# Altium PCB PCB1.PcbDoc
Units mil, origin at the board's own origin, x right, y up, seen from the top; angles counter-clockwise.
Board outline 1425.03 x 440.03 mil, 2 copper layers (Top Layer, Bottom Layer); 8 components, 6 nets, 20 pads, 1 vias.
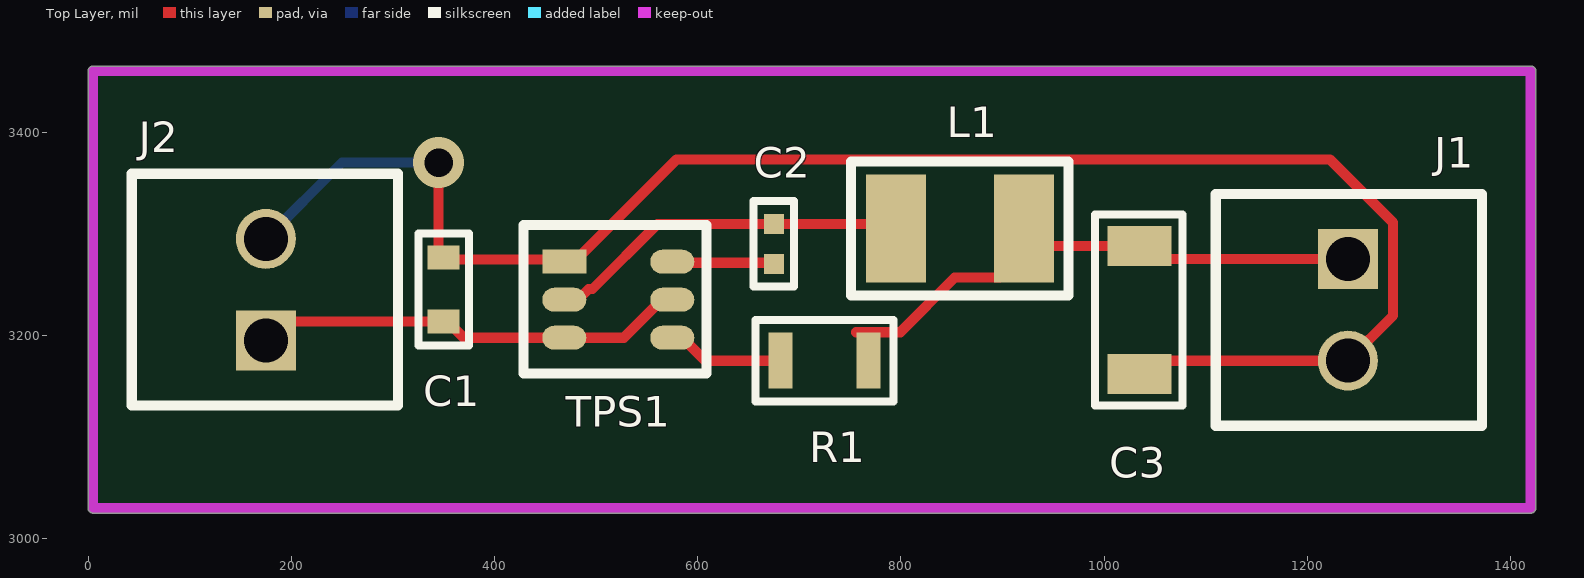
[diagram p0: Top Layer view]
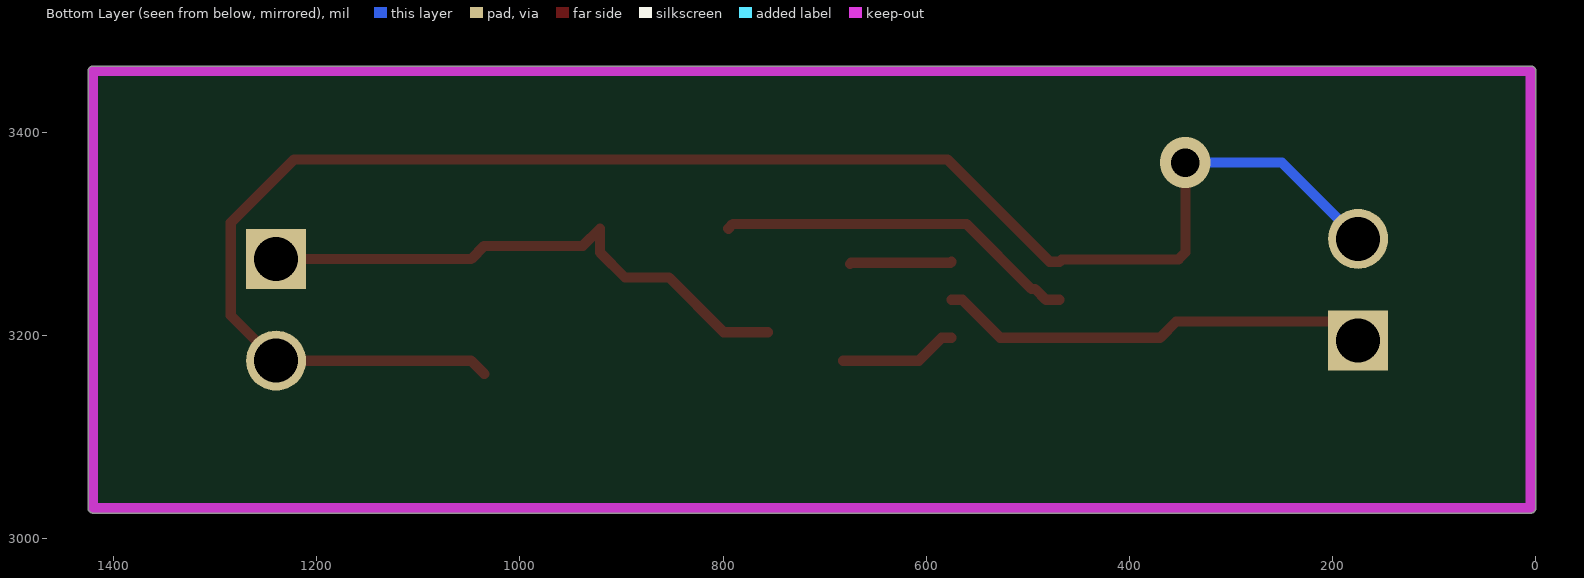
[diagram p1: Bottom Layer view, seen from below]
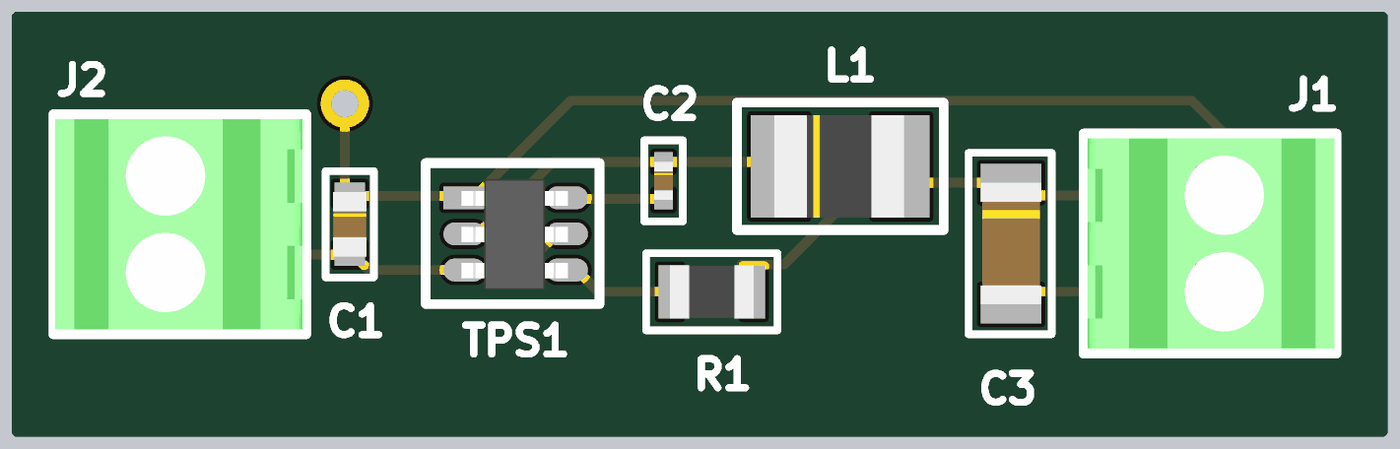
[diagram p2: 3D render of the assembled board from above, using the file's embedded part models]

## Layer stack, top to bottom
Top Solder: solder mask 0.4, Solder Resist, Dk 3.5
Top Layer: signal copper 1.4
Dielectric 1: dielectric 12.6, FR-4, Dk 4.8
Bottom Layer: signal copper 1.4
Bottom Solder: solder mask 0.4, Solder Resist, Dk 3.5

## Board outline
5,3024.99 cw(c5,3030) -0.01,3030 -0.01,3460 cw(c5,3460) 5,3465.01 1420,3465.01 cw(c1420,3460) 1425.02,3460 1425.02,3030 cw(c1420,3030) 1420,3024.99

## Design rules (kind name [scope] priority, off if disabled: settings)
Clearance [All] p1: gap=10 ignorepadtopadclearanceinfootprint=FALSE
PolygonConnect [All] p1: connectstyle=Relief reliefconductorwidth=10 reliefentries=4 polygonreliefangle="90 Angle" airgapwidth=10
RoutingVias [All] p1: holewidth=28 width=50 viastyle="Through Hole" minholewidth=28 minwidth=50 maxholewidth=28 maxwidth=50
SolderMaskExpansion [All] p1: expansion=4 istentingtop=FALSE
Width [All] p1: maxlimit=10 minlimit=10 preferedwidth=10
30 further rules are at their usual default settings.

## Components (designator, comment, footprint, x,y, rotation, side; value= is the part's Value field where it differs from the comment)
C1 "22uf" "Capacitor 22uf 10v" 350,3245 r90 top
C2 "0.1uf" "Capacitor 0.1uf 10v" 675,3290 r90 top value=100nF
C3 "47uf" "Capacitor 47uf" 1035,3225 r90 top
J1 "282834-2 connector" 282834-2 1240,3275 r270 top
J2 "282834-2 connector" 282834-2 175,3195 r90 top
L1 "4.7uh" "Inductor 4.7uh 1a" 795,3305 r0 top
R1 "36K" "Resistor 36K" 725,3175 r0 top value=36kR
TPS1 "TPS561208DDCR" TPS 468.7,3272.4 r0 top

## Footprints (in the part's own frame and the unit in brackets; to place one, negate y for a bottom-side part, rotate by r counter-clockwise, add the part's x,y. Pads: shape width x height; smd on the part's side, far side on the other; paste and mask are expansions set on the pad)
282834-2 [mm]
  rect 1.5x1.5 hole 1.1: 1(0,0)
  round 1.5 hole 1.1: 2(2.54,0)
  silkscreen extent -1.63,-3.3 4.17,3.35, body extent -1.5,-3.2 4.04,3.3, height 13.41
"Capacitor 0.1uf 10v" [mm]
  rect 0.5x0.5 smd: 1(-0.5,0) 2(0.5,0)
  silkscreen extent -1.07,-0.51 1.07,0.51, body extent -0.5,-0.25 0.5,0.25, height 0.55
"Capacitor 22uf 10v" [mm]
  rect 0.6x0.8 smd: 1(-0.8,0) 2(0.8,0)
  silkscreen extent -1.4,-0.64 1.4,0.64, body extent -0.85,-0.44 0.85,0.44, height 0.89
"Capacitor 47uf" [mm]
  rect 1x1.6 smd: 1(-1.6,0) 2(1.6,0)
  silkscreen extent -2.39,-1.07 2.39,1.12, body extent -1.6,-0.8 1.6,0.8, height 1
"Inductor 4.7uh 1a" [mm]
  rect 1.5x2.7 smd: 1(0,0) 2(3.2,0)
  silkscreen extent -1.12,-1.68 4.32,1.68, body extent -0.13,-1.35 3.28,1.35, height 1.73
"Resistor 36K" [mm]
  rect 0.6x1.4 smd: 1(-1.1,0) 2(1.1,0)
  silkscreen extent -1.73,-1.02 1.73,1.02, body extent -1.1,-0.7 1.1,0.7, height 0.51
TPS [mm]
  rect 1.1x0.6 smd: 1(0,0)
  oval 1.1x0.6 smd: 2(0,-0.95) 3(0,-1.9) 4(2.7,-1.9) 5(2.7,-0.95) 6(2.7,0)
  silkscreen extent -1.02,-2.79 3.56,0.91, body extent -0.08,-2.42 2.72,0.48, height 0.97

## Part data
C1: library part CL10A226MP8ZUNE, Manufacturer=Samsung, Supplier Part Number=1276-CL10A226MP8ZUNETR-ND, Category="Ceramic Capacitors", Manufacturer Part Number=CL10A226MP8ZUNE, Pricing="300000=0.04242 (USD)", RoHS=Yes, Supplier=Digikey
C2: library part CL05A104KP5NNNC, "Multilayer Ceramic Capacitor, 0.1 uF, 10 V, ± 10%, X5R, 0402 [1005 Metric]", Case Code (Imperial)=0402, Case Code (Metric)=1005, Dielectric=X5R, Manufacturer=Samsung, Max Operating Temperature=85°C, Min Operating Temperature=-55°C, Tolerance=10%, Voltage Rating=10V, Case/Package=0402, Category="Ceramic Capacitors", ComponentLink1Description=https://datasheet.ciiva.com/25709/cl05a104kp5nnnc-25709120.pdf?src-supplier=Digikey, ComponentLink1URL=https://datasheet.ciiva.com/25709/cl05a104kp5nnnc-25709120.pdf?src-supplier=Digikey, ComponentLink2Description=https://datasheet.ciiva.com/26838/getdatasheetpartid-358611-26838151.pdf?src-supplier=Verical, ComponentLink2URL=https://datasheet.ciiva.com/26838/getdatasheetpartid-358611-26838151.pdf?src-supplier=Verical, ComponentLink3Description=https://datasheet.ciiva.com/16437/cl05b104kq5nnnc-16437370.pdf?src-supplier=Future+Electronics, ComponentLink3URL=https://datasheet.ciiva.com/16437/cl05b104kq5nnnc-16437370.pdf?src-supplier=Future+Electronics, ComponentLink4Description=https://datasheet.ciiva.com/26309/mlcc-catalogdownload2013-eng-26309007.pdf?src-supplier=Distrelec, ComponentLink4URL=https://datasheet.ciiva.com/26309/mlcc-catalogdownload2013-eng-26309007.pdf?src-supplier=Distrelec, Construction=Flat, Depth=0.5mm, Height=0.5mm, Length=1mm, Manufacturer Part Number=CL05A104KP5NNNC, Material=4241ConductorMaterial, Mounting Technology="Surface Mount", Packaging="Tape and Reel", Pricing="10000=0.00207 (USD)", Radiation Hardening=No, RoHS=Yes, RoHS Compliant=Yes, Series=CL, Stock=2160000, Supplier=Avnet, Supplier Part Number=CL05A104KP5NNNC, Thickness=0.022inch, Voltage Rating (DC)=10V, Width=0.02inch
C3: library part CL31A476MPHNNNE, "Cap Ceramic 47uF 10V X5R 20% SMD 1206 85°C Embossed Plastic T/R", Manufacturer=Samsung, Category="Ceramic Capacitors", ComponentLink1Description=https://datasheet.ciiva.com/25723/cl31a476mphnnne-25723732.pdf?src-supplier=Digikey, ComponentLink1URL=https://datasheet.ciiva.com/25723/cl31a476mphnnne-25723732.pdf?src-supplier=Digikey, ComponentLink2Description=https://datasheet.ciiva.com/15216/getdatasheetpartid-467074-15216239.pdf?src-supplier=Verical, ComponentLink2URL=https://datasheet.ciiva.com/15216/getdatasheetpartid-467074-15216239.pdf?src-supplier=Verical, ComponentLink3Description=https://datasheet.ciiva.com/29201/452069-da-01-en-vs-kondensator-1206-29201604.pdf?src-supplier=Conrad, ComponentLink3URL=https://datasheet.ciiva.com/29201/452069-da-01-en-vs-kondensator-1206-29201604.pdf?src-supplier=Conrad, Manufacturer Part Number=CL31A476MPHNNNE, Pricing="2000=0.113, 4000=0.1104, 8000=0.1078, 12000=0.1052, 16000=0.10261 (USD)", RoHS=Yes, Stock=102000, Supplier=Avnet, Supplier Part Number=CL31A476MPHNNNE
J1 J2: library part 282834-2, "Conn PC Board Terminal Block Receptacle 2 POS 2.54mm RA Through Hole 10A", Color=Green, Current=10A, Flammability Rating="UL94 V-0", Manufacturer="TE Connectivity", Max Operating Temperature=105°C, Max Supply Voltage (AC)=150V, Min Operating Temperature=-40°C, Package Quantity=300, Supplier Part Number=7100104P, Approvals=UL, Category="Terminal Blocks", Closed End="No (Without)", ComponentLink1Description=https://datasheet.ciiva.com/11758/0900766b80e7dc96-11758675.pdf?src-supplier=Rs, ComponentLink1URL=https://datasheet.ciiva.com/11758/0900766b80e7dc96-11758675.pdf?src-supplier=Rs, ComponentLink2Description=https://datasheet.ciiva.com/16386/282834-2-16386363.pdf?src-supplier=Future+Electronics, ComponentLink2URL=https://datasheet.ciiva.com/16386/282834-2-16386363.pdf?src-supplier=Future+Electronics, ComponentLink3Description=https://datasheet.ciiva.com/823/eng-cd-282834-c1-823453.pdf?src-supplier=Digikey, ComponentLink3URL=https://datasheet.ciiva.com/823/eng-cd-282834-c1-823453.pdf?src-supplier=Digikey, ComponentLink4Description=https://datasheet.ciiva.com/3141/eng-cs-1308389-eurostyle-terminal-blocks-0607-3141115.pdf?src-supplier=Avnet, ComponentLink4URL=https://datasheet.ciiva.com/3141/eng-cs-1308389-eurostyle-terminal-blocks-0607-3141115.pdf?src-supplier=Avnet, ComponentLink5Description=https://datasheet.ciiva.com/15169/getdatasheetpartid-155864-15169558.pdf?src-supplier=Verical, ComponentLink5URL=https://datasheet.ciiva.com/15169/getdatasheetpartid-155864-15169558.pdf?src-supplier=Verical, ComponentLink6Description=https://datasheet.ciiva.com/30166/eng-cs-1308389-eurostyle-terminal-blocks-0607-30166974.pdf?src-supplier=Onlinecomponents.com, ComponentLink6URL=https://datasheet.ciiva.com/30166/eng-cs-1308389-eurostyle-terminal-blocks-0607-30166974.pdf?src-supplier=Onlinecomponents.com, ComponentLink7Description=https://datasheet.ciiva.com/14609/70086732-14609670.pdf?src-supplier=Allied+Electronics, ComponentLink7URL=https://datasheet.ciiva.com/14609/70086732-14609670.pdf?src-supplier=Allied+Electronics, Connector System=5937ConnectorSystem, Connector Type=Receptacle, Contact Material=Brass, Contact Plating=Tin, Current Rating=10A, Depth=6.5mm, Gender=Male, Housing Color=Green, Housing Material=Polyamide, Interlock="No (Without)", Lead Free="Lead Free", Length=5.54mm, Manufacturer Part Number=282834-2, Material=Nylon, Max Current Rating=10A, Max Voltage Rating (AC)=150V, Mounting Technology="Through Hole", Number of Circuits=2, Number of Contacts=2, Number of Levels=1, Number of Poles=2, Number of Positions=2, Number of Positions Per Level=2, Number of Rows=1, Operating Supply Voltage=150V, Orientation=Straight, Packaging=Bulk, Pitch=2.54mm, Plating=Brass,Steel, Pricing="125=0.822, 375=0.692, 1000=0.584, 2000=0.528 (GBP)", Radiation Hardening=No, Reach SVHC Compliant=Unknown, RoHS=Yes, RoHS Compliant=Yes, Screw Flange="No (Without)", Screwless Terminal Block="Yes (With)", Series=Buchanan, Side Stackable="Yes (With)", Stock=12560, Supplier=Rs, Tail Length=3.4mm, Termination=Solder, Thread Size=M1.6, Voltage=150V, Voltage Rating=150V, Width=6.5mm, Wire Gauge (Max)=30AWG, Wire Gauge (Min)=30AWG, Wire/Cable Gauge=30AWG
L1: library part BRL3225T4R7M, "FIXED IND 4.7UH 1A 216 MOHM SMD", Manufacturer="Taiyo Yuden", Supplier Part Number=25R4119, Category="Fixed Inductors", ComponentLink1Description=https://datasheet.ciiva.com/15981/8brl3225t4r7m-15981663.pdf?src-supplier=Onlinecomponents.com, ComponentLink1URL=https://datasheet.ciiva.com/15981/8brl3225t4r7m-15981663.pdf?src-supplier=Onlinecomponents.com, ComponentLink2Description=https://datasheet.ciiva.com/7291/brl3225t4r7m-ss-7291489.pdf?src-supplier=Newark, ComponentLink2URL=https://datasheet.ciiva.com/7291/brl3225t4r7m-ss-7291489.pdf?src-supplier=Newark, ComponentLink3Description=https://datasheet.ciiva.com/26871/getdatasheetpartid-638954-26871104.pdf?src-supplier=Verical, ComponentLink3URL=https://datasheet.ciiva.com/26871/getdatasheetpartid-638954-26871104.pdf?src-supplier=Verical, ComponentLink4Description=https://datasheet.ciiva.com/25607/0900766b810b3c54-25607088.pdf?src-supplier=Rs, ComponentLink4URL=https://datasheet.ciiva.com/25607/0900766b810b3c54-25607088.pdf?src-supplier=Rs, ComponentLink5Description=https://datasheet.ciiva.com/1040/wound07-e-1040626.pdf?src-supplier=Digikey, ComponentLink5URL=https://datasheet.ciiva.com/1040/wound07-e-1040626.pdf?src-supplier=Digikey, ComponentLink6Description=https://datasheet.ciiva.com/1040/wound07-e-1040627.pdf?src-supplier=Digikey, ComponentLink6URL=https://datasheet.ciiva.com/1040/wound07-e-1040627.pdf?src-supplier=Digikey, ComponentLink7Description=https://datasheet.ciiva.com/1040/wound07-e-1040628.pdf?src-supplier=Digikey, ComponentLink7URL=https://datasheet.ciiva.com/1040/wound07-e-1040628.pdf?src-supplier=Digikey, ComponentLink8Description=https://datasheet.ciiva.com/8505/wound07-e-8505597.pdf?src-supplier=Avnet, ComponentLink8URL=https://datasheet.ciiva.com/8505/wound07-e-8505597.pdf?src-supplier=Avnet, Manufacturer Part Number=BRL3225T4R7M, Pricing="1=0.229, 10=0.159, 25=0.147, 50=0.134, 100=0.122 (USD)", RoHS=Yes, Stock=1070, Supplier=Avnet
R1: library part CRCW080536K0FKEA, "SMD Chip Resistor, 36 kOhm, ± 1%, 125 mW, 0805 [2012 Metric], Thick Film, General Purpose", Case Code (Imperial)=0805, Case Code (Metric)=2012, Manufacturer=Vishay, Max Operating Temperature=155°C, Max Power Dissipation=125mW, Min Operating Temperature=-55°C, Package Quantity=5000, Ratings=AEC-Q200, Resistance Tolerance=1%, Resistor Type="Thick Film", Supplier Part Number=71-CRCW080536K0FKEA, Temperature Coefficient=100ppm/°C, Voltage Rating=150V, Case/Package=0805, Category="Chip SMD Resistors", ComponentLink1Description=https://datasheet.ciiva.com/11818/0900766b80d98b26-11818207.pdf?src-supplier=Rs, ComponentLink1URL=https://datasheet.ciiva.com/11818/0900766b80d98b26-11818207.pdf?src-supplier=Rs, ComponentLink2Description=https://datasheet.ciiva.com/7671/1697337-7671691.pdf?src-supplier=Element14, ComponentLink2URL=https://datasheet.ciiva.com/7671/1697337-7671691.pdf?src-supplier=Element14, ComponentLink3Description=https://datasheet.ciiva.com/2496/dcrcwe3-2496185.pdf?src-supplier=Digikey, ComponentLink3URL=https://datasheet.ciiva.com/2496/dcrcwe3-2496185.pdf?src-supplier=Digikey, ComponentLink4Description=https://datasheet.ciiva.com/2496/dcrcwe3-2496186.pdf?src-supplier=Digikey, ComponentLink4URL=https://datasheet.ciiva.com/2496/dcrcwe3-2496186.pdf?src-supplier=Digikey, ComponentLink5Description=https://datasheet.ciiva.com/2496/dcrcwe3-2496184.pdf?src-supplier=Digikey, ComponentLink5URL=https://datasheet.ciiva.com/2496/dcrcwe3-2496184.pdf?src-supplier=Digikey, ComponentLink6Description=https://datasheet.ciiva.com/7725/66915-7725941.pdf?src-supplier=Element14, ComponentLink6URL=https://datasheet.ciiva.com/7725/66915-7725941.pdf?src-supplier=Element14, ComponentLink7Description=https://datasheet.ciiva.com/26314/fld-crcw-e3-data-en-26314581.pdf?src-supplier=Distrelec, ComponentLink7URL=https://datasheet.ciiva.com/26314/fld-crcw-e3-data-en-26314581.pdf?src-supplier=Distrelec, ComponentLink8Description=https://datasheet.ciiva.com/7671/1697337-7671690.pdf?src-supplier=Element14, ComponentLink8URL=https://datasheet.ciiva.com/7671/1697337-7671690.pdf?src-supplier=Element14, ComponentLink9Description=https://datasheet.ciiva.com/22683/1912744-22683321.pdf?src-supplier=Element14, ComponentLink9URL=https://datasheet.ciiva.com/22683/1912744-22683321.pdf?src-supplier=Element14, ComponentLink10Description=https://datasheet.ciiva.com/16396/dcrcwe3-16396283.pdf?src-supplier=Future+Electronics, ComponentLink10URL=https://datasheet.ciiva.com/16396/dcrcwe3-16396283.pdf?src-supplier=Future+Electronics, Construction=Rectangular, Contact Plating=Tin, Depth=1.25mm, Features="Automotive AEC-Q200", Height=0.45mm, Lead Free=5697LeadFree, Length=2mm, Manufacturer Part Number=CRCW080536K0FKEA, Military Standard=Not, Number of Terminations=2, Packaging="Tape and Reel", Pins=2, Power Rating=125mW, Pricing="1=0.1, 10=0.025, 50=0.025, 100=0.015, 1000=0.012, 10000=0.008 (USD)", Reach SVHC Compliant=Unknown, RoHS=Yes, RoHS Compliant=Yes, Series=CRCW, Stock=11437, Supplier=Mouser, Technology="THICK FILM", Termination=SMD/SMT, Tolerance=1%, Voltage Rating (DC)=150V, Weight=0.000194oz, Width=1.25mm
TPS1: "4.5V to 17V Input, 1A Output, Synchronous Step-Down Converter 6-SOT-23-THIN -40 to 125", Case/Package=SOT-23-6, Manufacturer="Texas Instruments", Max Operating Temperature=85°C, Max Output Voltage=7V, Max Supply Voltage=17V, Min Input Voltage=4.5V, Min Operating Temperature=-40°C, Min Output Voltage=760mV, Nominal Supply Current=590uA, Output Current=1A, Output Voltage=1.05V, Supplier Part Number=595-TPS561208DDCR, Switching Frequency=580kHz, Category="Voltage Regulators - Switching", ComponentLink1Description=http://www.ti.com/lit/ds/symlink/tps561201.pdf?src-supplier=Digikey, ComponentLink1URL=http://www.ti.com/lit/ds/symlink/tps561201.pdf?src-supplier=Digikey, Height=1.1mm, Length=2.9mm, Manufacturer Part Number=TPS561208DDCR, Max Duty Cycle=75%, Min Supply Voltage=4.5V, Mounting Technology="Surface Mount", Number of Outputs=1, Output Configuration=Positive, Output Type=Adjustable, Packaging="Cut Tape", Pins=6NUMBER, Pricing="1=0.6, 10=0.498, 50=0.498, 100=0.377, 1000=0.255, 10000=0.207 (USD)", RoHS=Yes, RoHS Compliant=Yes, Series=SWIFT™, Stock=4365, Supplier=Mouser, Synchronous Rectifier=Yes, Thickness=870um, Width=1.6mm

## Via types
v1: diameter 50, hole 28, Top Layer to Bottom Layer, 1 vias

## Nets (pads, with @x,y where several pads share a name; then routed paths per layer and width w, separated by ;. In a path a pad name is that pad's centre, name@x,y a point inside that pad or via, vN(x,y) a via of type N, cw(c..) or ccw(c..) an arc to the next point about the centre after c; other vN are vias at no path point)
GND: C1.2 C3.1 J1.2 J2.2 TPS1.1 | length 1678.3
  Top Layer w10: J2.2 J2.2@188.27,3295 ; v1(345,3370) 345,3281.5 C1.2 352.05,3274.45 466.65,3274.45 TPS1.1 478.54,3272.4 579.29,3373.15 1222.12,3373.15 1284.53,3310.74 1284.53,3219.53 J1.2 1047.99,3175 C3.1
  Bottom Layer w10: J2.2 250,3370 v1(345,3370)
NetC1_1: C1.1 J2.1 TPS1.3 TPS1.5 | length 429.7
  Top Layer w10: J2.1 193.5,3213.5 C1.1 353.94,3213.5 369.84,3197.6 TPS1.3 527.24,3197.6 564.64,3235 TPS1.5
NetC2_1: C2.1 TPS1.6 | length 100.9
  Top Layer w10: TPS1.6 576.04,3271.36 673.96,3271.36 C2.1
NetC2_2: C2.2 L1.1 TPS1.2 | length 359.6
  Top Layer w10: TPS1.2 482.23,3235 492.82,3245.59 496.57,3245.59 560.66,3309.69 C2.2 790.31,3309.69 L1.1 L1.1@794.69,3304.69
NetC3_2: C3.2 J1.1 L1.2 R1.2 | length 552.5
  Top Layer w10: 755.98,3203.07 799.33,3203.07 853.11,3256.85 896.46,3256.85 920.98,3281.38 L1.2 937.99,3287.99 C3.2 1047.99,3275 J1.1
NetR1_1: R1.1 TPS1.4 | length 116.1
  Top Layer w10: TPS1.4 584.84,3197.6 607.44,3175 R1.1

## Keep-outs
Keep-Out Layer:
  lines w10: 5,3030 5,3460 1420,3460 1420,3030 5,3030